# Altium PCB toaster.PcbDoc
Units mm, origin at the board's own origin, x right, y up, seen from the top; angles counter-clockwise.
Board outline 65 x 31 mm, 2 copper layers (Top Layer, Bottom Layer), stack 1.549 mm thick; 29 components, 15 nets, 73 pads, 35 vias.
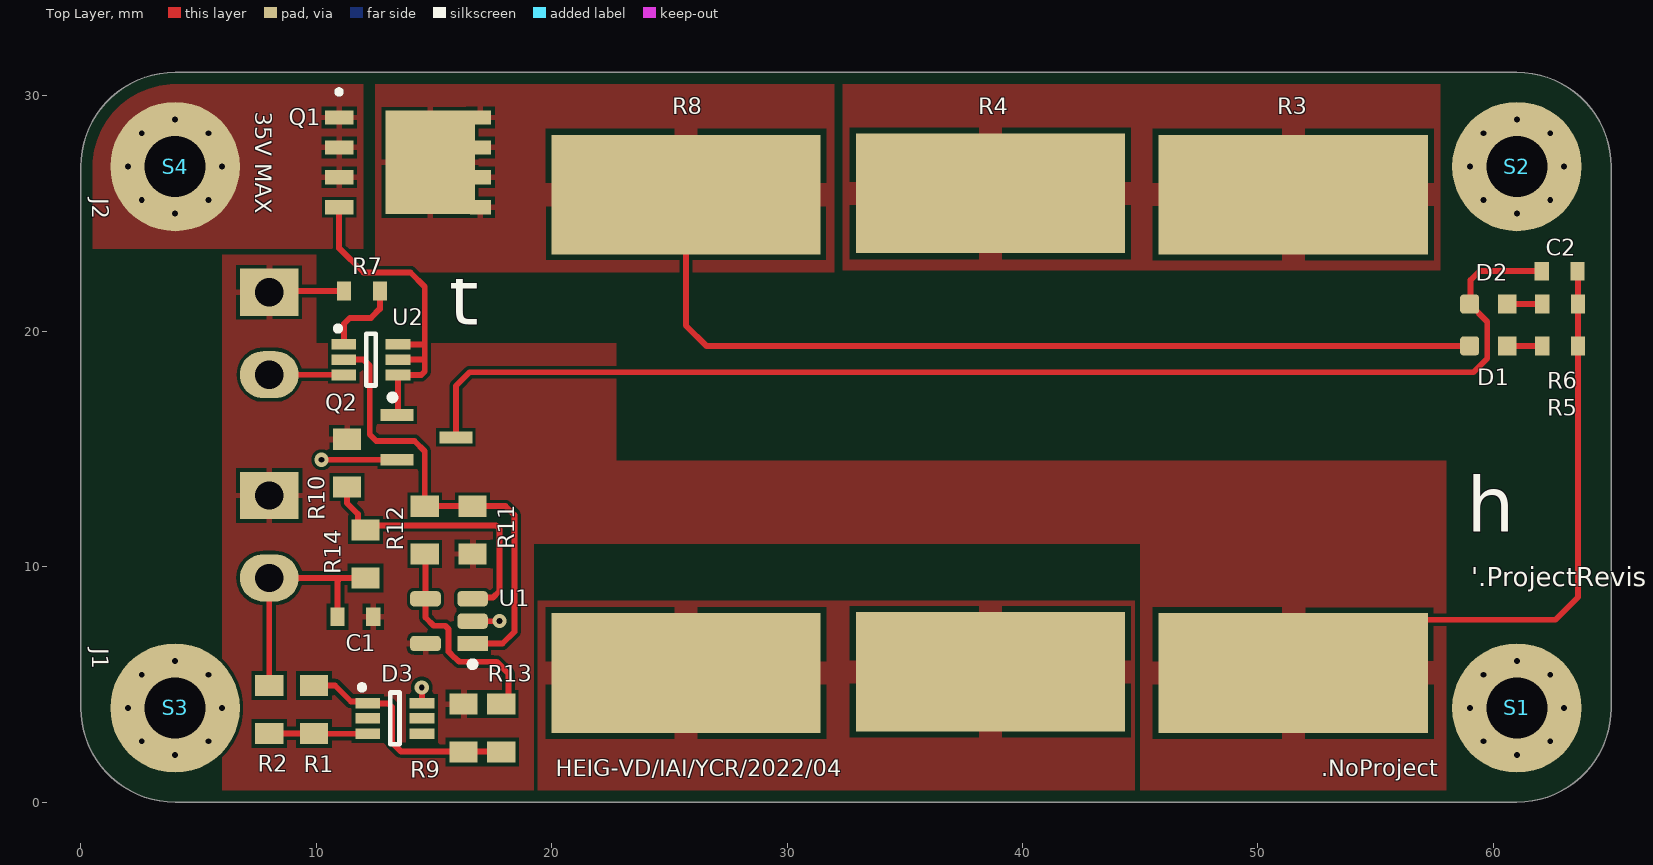
[diagram p0: Top Layer view]
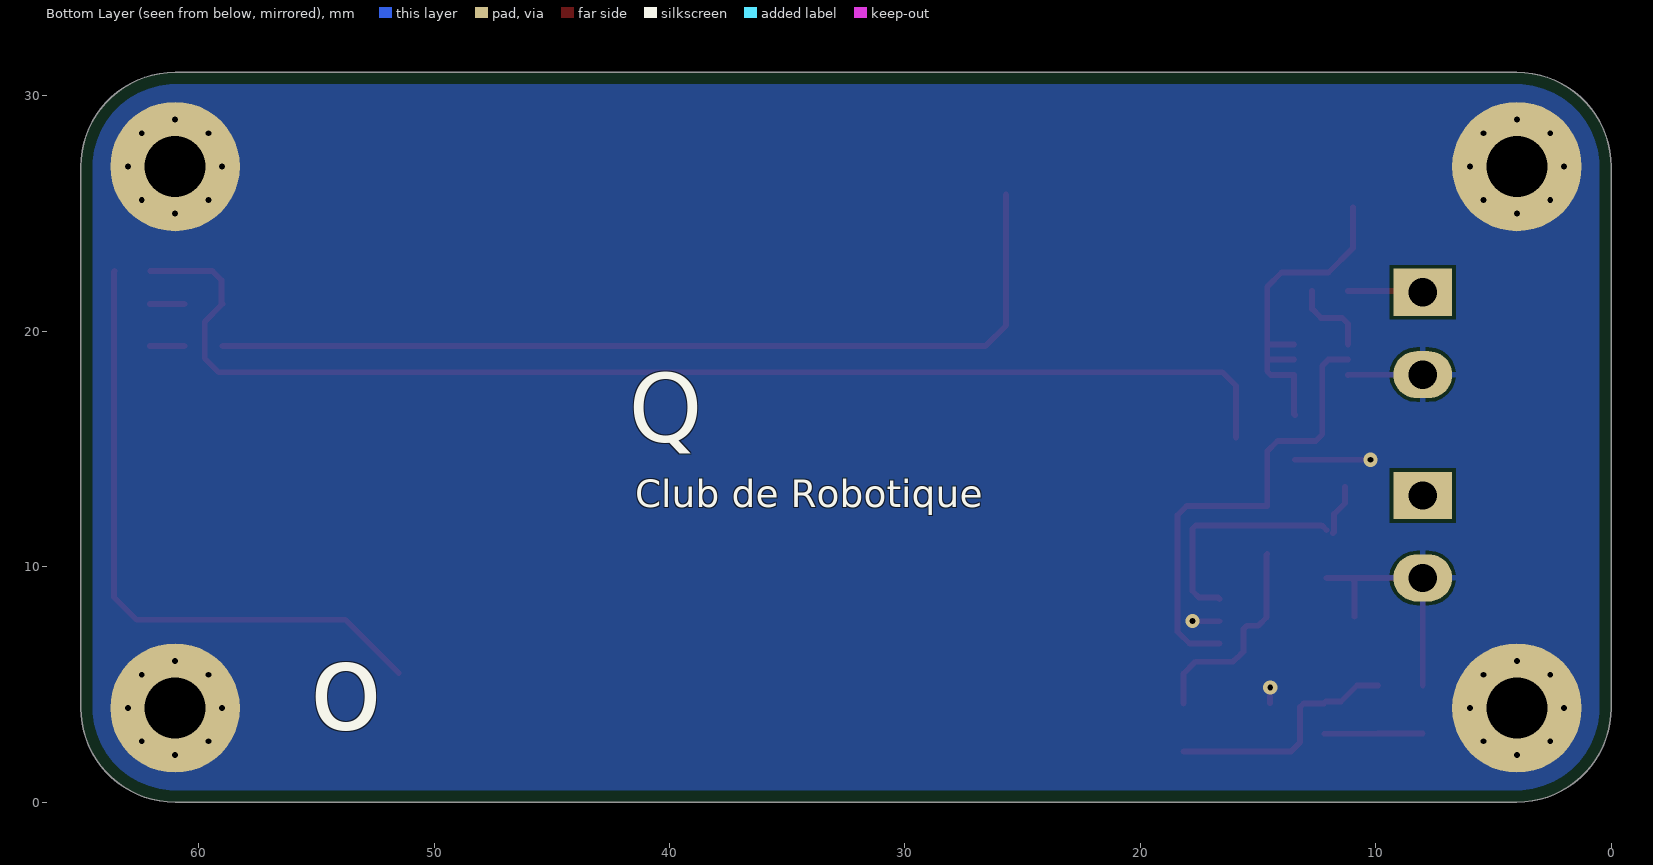
[diagram p1: Bottom Layer view, seen from below]
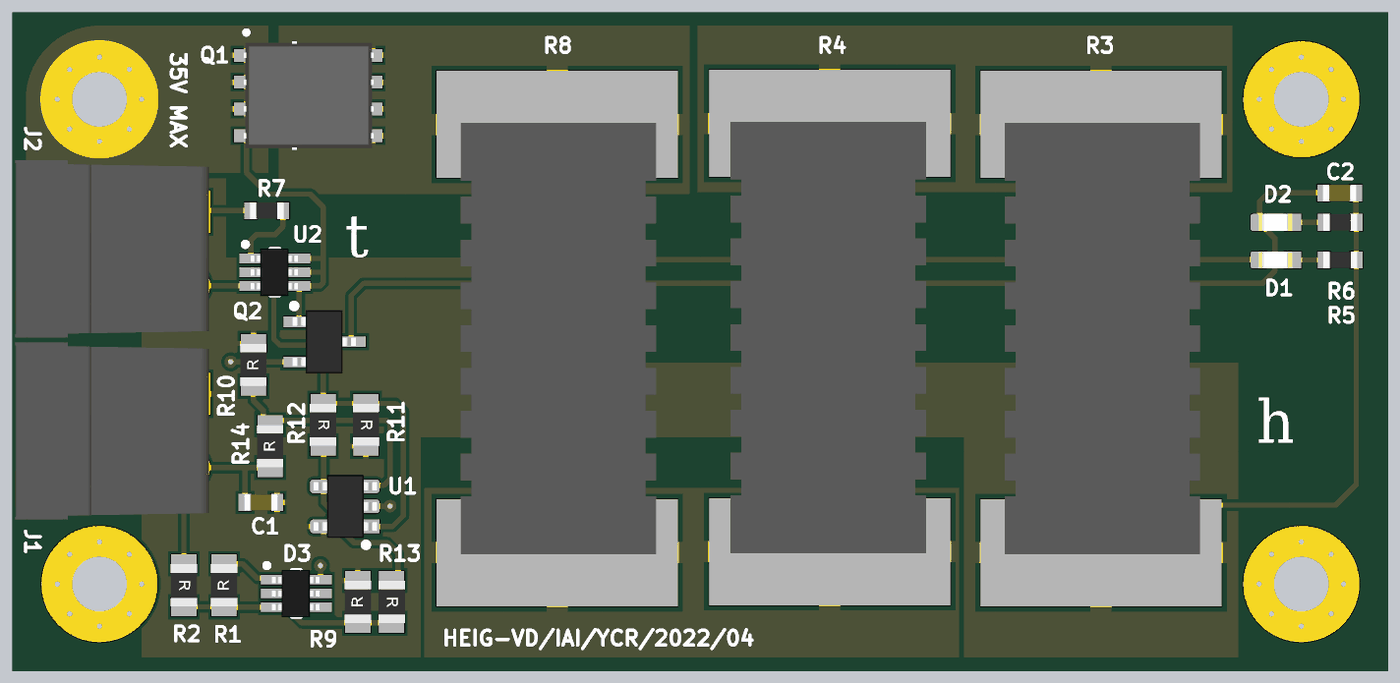
[diagram p2: 3D render of the assembled board from above, using the file's embedded part models]

## Layer stack, top to bottom
Top Solder: solder mask 0.0102, Solder Resist, Dk 3.5
Top Layer: signal copper 0.0356
Dielectric 1: dielectric 1.478, FR-4, Dk 4.8
Bottom Layer: signal copper 0.0356
Bottom Solder: solder mask 0.0102, Solder Resist, Dk 3.5

## Board outline
4,0 cw(c4,4) 0,4 0,27 cw(c4,27) 4,31 61,31 cw(c61,27) 65,27 65,4 cw(c61,4) 61,0

## Design rules (kind name [scope] priority, off if disabled: settings)
BoardOutlineClearance Connectors [(InComponent('J1') OR InComponent('J2'))] p1: gap=0 ignorepadtopadclearanceinfootprint=FALSE
BoardOutlineClearance [All] p2: gap=0.5 ignorepadtopadclearanceinfootprint=FALSE
Clearance [All] p1: gap=0.15 ignorepadtopadclearanceinfootprint=FALSE
HoleSize [All] p1: absolutevalues=TRUE maxlimit=5.08 minlimit=0.25 maxpercent=80.000 minpercent=20.000
HoleToHoleClearance [All] p1: gap=0.15 allowstackedmicrovias=TRUE
MinimumSolderMaskSliver [All] p1: minsoldermaskwidth=0.1
PolygonConnect R [HasFootprint('RW5S0FA')] p1: connectstyle=Relief reliefconductorwidth=1 reliefentries=4 polygonreliefangle="90 Angle" airgapwidth=0.25
PolygonConnect S [HasFootprint('HW/HOLE/M2.5/VIA')] p2: connectstyle=Direct reliefconductorwidth=0.254 reliefentries=4 polygonreliefangle="90 Angle" airgapwidth=0.254
PolygonConnect [All] p3: thpad.connectstyle=Relief thpad.reliefconductorwidth=0.25 thpad.reliefentries=4 thpad.polygonreliefangle="90 Angle" thpad.airgapwidth=0.15 smdpad.connectstyle=Relief smdpad.reliefconductorwidth=0.25 smdpad.reliefentries=4 smdpad.polygonreliefangle="90 Angle" smdpad.airgapwidth=0.15 via.connectstyle=Direct via.reliefconductorwidth=0.254 via.reliefentries=4 via.polygonreliefangle="90 Angle" via.airgapwidth=0.254
RoutingVias [All] p1: holewidth=0.25 width=0.6 viastyle="Through Hole" minholewidth=0.25 minwidth=0.6 maxholewidth=1 maxwidth=2
SilkToSilkClearance [All] p1: silktosilkclearance=0.1
SilkToSolderMaskClearance [IsPad] p1: minsilkscreentomaskgap=0.15 clearancetoexposedcopper=TRUE
SolderMaskExpansion [All] p1: expansion=0.05 istentingtop=FALSE
UnRoutedNet [All] p1: checkbadconnections=TRUE
Width [All] p1: maxlimit=1 minlimit=0.15 preferedwidth=0.25
24 further rules are at their usual default settings.

## Components (designator, comment, footprint, x,y, rotation, side; value= is the part's Value field where it differs from the comment)
C1 "100n" SM/C0603 11.684,7.874 r0 top
C2 "47uF" SM/C0603 62.84,22.555 r0 top
D1 "" SM/LED0603 59.792,19.38 r180 top
D2 "" SM/LED0603 59.792,21.158 r180 top
D3 "TL431BCDCKT" SC70-6 13.335,3.556 r0 top
J1 "395021002" "CONN2/PHOENIX/MC 1.5-2-G-3.5-BLACK" 8.001,13.025 r270 top
J2 "395021002" "CONN2/PHOENIX/MC 1.5-2-G-3.5-BLACK" 8.001,21.661 r270 top
Q1 "STL2N80K5" PG-TDSON-8_INF 13.97,27.178 r0 top
Q2 "DMN67D7L-7" SOT23-3 14.732,15.494 r0 top
R1 "100k" SM/R0805 9.906,3.937 r90 top
R2 "100k" SM/R0805 8.001,3.937 r270 top
R3 "10" RW5S0FA 51.5,28.346 r270 top
R4 "10" RW5S0FA 38.633,2.997 r90 top
R5 "220" SM/R0603 62.84,19.38 r0 top
R6 "220" SM/R0603 62.84,21.158 r0 top
R7 "100" SM/R0603 11.938,21.717 r0 top
R8 "10" RW5S0FA 25.705,28.346 r270 top
R9 "10k" SM/R0805 16.256,3.15 r90 top
R10 "620k" SM/R0805 11.303,14.402 r90 top
R11 "10k" SM/R0805 16.637,11.557 r270 top
R12 "560k" SM/R0805 14.605,11.557 r270 top
R13 "20k" SM/R0805 17.856,3.15 r270 top
R14 "820k" SM/R0805 12.09,10.541 r90 top
S1 "M2.5" HW/HOLE/M2.5/VIA 61,4 r0 top
S2 "M2.5" HW/HOLE/M2.5/VIA 61,27 r0 top
S3 "M2.5" HW/HOLE/M2.5/VIA 4,4 r0 top
S4 "M2.5" HW/HOLE/M2.5/VIA 4,27 r0 top
U1 "TS391" SOT23-5 15.637,7.686 r180 top
U2 "ZXGD3009DYTA" SC70-6 12.319,18.796 r0 top

## Footprints (in the part's own frame and the unit in brackets; to place one, negate y for a bottom-side part, rotate by r counter-clockwise, add the part's x,y. Pads: shape width x height; smd on the part's side, far side on the other; paste and mask are expansions set on the pad)
"CONN2/PHOENIX/MC 1.5-2-G-3.5-BLACK" [mm]
  rect 2x2.5 hole 1.2: 1(0,0)
  oval 2x2.5 hole 1.2: 2(3.5,0)
  body extent -2.44,-8 5.96,1.2, height 7.25
HW/HOLE/M2.5/VIA [mm]
  round 5.5 hole 2.6: 1(0,0)
PG-TDSON-8_INF [mm]
  rect 1.2x0.6 smd: 1(-3,1.905) 2(-3,0.635) 3(-3,-0.635) 4(-3,-1.905)
  rect 0.9x0.6 smd: 5(3,-1.905) 6(3,-0.635) 7(3,0.635) 8(3,1.905)
  rect 3.8x4.4 smd paste-3: 8(0.864,0)
  silkscreen extent -3.1,2.89 -2.9,3.09, body extent -3.12,-2.58 3.03,2.58, height 1.1
RW5S0FA [mm]
  rect 5.08x11.43 smd: 1(2.54,0) 2(22.86,0)
  body extent 2.46,-4.57 22.94,4.7, height 10.31
SC70-6 [mm] "SOT363, 6-Leads, Body 2x1.3mm, Pitch 0.65mm, Lead Span 2.1mm, IPC Low Density"
  rect 1.05x0.45 smd: 1(-1.15,0.65) 2(-1.15,0) 3(-1.15,-0.65) 4(1.15,-0.65) 5(1.15,0) 6(1.15,0.65)
  silkscreen extent -1.49,-1.1 0.2,1.41, body extent -1.15,-1.13 1.1,1.12, height 1.1
SM/C0603 [mm] "Chip Capacitor, Body 1.6x0.8mm, IPC Low Density"
  rect 0.6x0.8 smd: 1(-0.787,0) 2(0.737,0)
  body extent -0.83,-0.4 0.77,0.4, height 0.6
SM/LED0603 [mm] "Chip Capacitor, Body 1.6x0.8mm, IPC Low Density"
  rect 0.8x0.8 smd: 1(-0.8,0)
  rrect30% 0.8x0.8 smd: 2(0.8,0)
  body extent -0.78,-0.4 0.84,0.4, height 0.73
SM/R0603 [mm] "Chip Resistor, Body 1.6x0.8mm, IPC Low Density"
  rect 0.6x0.8 smd: 1(-0.762,0) 2(0.762,0)
  body extent -0.8,-0.4 0.8,0.4, height 0.4
SM/R0805 [mm] "Chip Resistor, Body 2.0x1.3mm, IPC Low Density"
  rect 0.9x1.2 smd: 1(-1.016,0) 2(1.016,0)
  body extent -1,-0.62 1,0.63, height 0.21
SOT23-3 [mm] "SOT23, 3-Leads, Body 3.0x2.6mm (max), Pitch 0.95mm, IPC Low Density"
  rect 1.4x0.5 smd: 1(-1.3,0.95) 2(-1.3,-0.95) 3(1.2,0)
  silkscreen extent -1.62,1.58 -1.37,1.82, body extent -1.57,-1.5 1.42,1.5, height 1.46
SOT23-5 [mm] "SOT23, 5-Leads, Body 3.0x2.6mm (max), Pitch 0.95mm, IPC Low Density"
  rect 1.3x0.65 smd: 1(-1,0.95)
  rrect50% 1.3x0.65 smd: 2(-1,0) 3(-1,-0.95) 4(1,-0.95) 5(1,0.95)
  silkscreen extent -1.13,1.7 -0.88,1.95, body extent -1.52,-1.5 1.48,1.5, height 1.45

## Part data
C1 C2: library part C, "Chip Capacitor", Dielectric=X7R, Supplier 2 Part Number=1292-1393-1-ND, Voltage=16V, Supplier 2=Digi-Key
D1 D2: library part LED, Supplier Part Number 1=492-1325-1-ND, Supplier 1=Digi-Key
D3: library part "D ZENER ADJ", "IC VREF SHUNT ADJ 0.5% SC70-6", Supplier Part Number 1=296-TL431BCDCKTCT-ND, Supplier 1=Digi-Key
J1 J2: library part "CONN 2 PHOENIX 3.5 mm", "TERM BLOCK HDR 2POS 90DEG 3.5MM BLACK", Supplier Part Number 1=WM7770-ND, Imax=8A, Supplier 1=Digi-Key
Q1: library part BSC0502NSIATMA1, "MOSFET N-CH 800V 2A POWERFLATN-Channel 800 V 2A (Tc) 33W (Tc) Surface Mount PowerFlat™ (5x6)", Supplier Part Number 1=497-14539-1-ND, Supplier 1=Digi-Key
Q2: library part FDN335, "MOSFET N-CH 60V 210MA SOT23-3", Supplier Part Number 1=DMN67D7L-7DICT-ND, Supplier 1=Digi-Key
R1 R2 R5 R6 R7 R9 R10 R11 R12 R13 R14: library part R, "Chip Resistor SMD"
R3 R4 R8: library part RT, "Chip Resistor SMD", Supplier Part Number 1=RW5S0FA10R0JE-ND, Supplier 1=Digi-Key
S1 S2 S3 S4: library part HOLE/M2.5
U1: Supplier Part Number 1=TS391SN2T1GOSCT-ND, Supplier 1=Digi-Key
U2: library part ZXGD3009DY, "IC GATE DRVR LOW-SIDE SOT363", Supplier Part Number 1=ZXGD3009DYTADICT-ND, Supplier 1=Digi-Key

## Via types
v1: diameter 0.6, hole 0.25, Top Layer to Bottom Layer, 32 vias
v2: diameter 0.6, hole 0.25, Top Layer to Bottom Layer, tented both sides, 3 vias

## Nets (pads, with @x,y where several pads share a name; then routed paths per layer and width w, separated by ;. In a path a pad name is that pad's centre, name@x,y a point inside that pad or via, vN(x,y) a via of type N, cw(c..) or ccw(c..) an arc to the next point about the centre after c; other vN are vias at no path point)
+VBUS: C1.2 C2.2 J1.1 J2.1 R3.2 R5.2 R6.2 R7.1 R9.2 R10.2 R11.2 U1.5 | length 30.5
  Top Layer w0.25: J2.1 8.057,21.717 R7.1 ; R3.2 53.761,7.747 62.636,7.747 63.602,8.712 R5.2 R6.2 63.589,21.171 63.589,22.543 C2.2
GND: C1.1 D3.6 J1.2 J2.2 Q1.1 Q1.2 Q1.3 Q2.2 R2.1 R14.1 S1.1 S2.1 S3.1 S4.1 U1.2 U2.3 | length 18.6
  Top Layer w0.25: R2.1 J1.2 10.795,9.525 ; J2.2 8.009,18.153 11.162,18.153 U2.3 ; v2(10.226,14.544) Q2.2 ; C1.1 10.897,9.373 10.922,9.398 10.795,9.525 ; R14.1 10.795,9.525 ; v2(14.478,4.877) 14.485,4.87 D3.6 ; U1.2 17.77,7.686 v2(17.78,7.696)
  other v1: 4,2 61,2 2.586,2.586 5.414,2.586 59.586,2.586 62.414,2.586 2,4 6,4 59,4 63,4 2.586,5.414 5.414,5.414 59.586,5.414 62.414,5.414 4,6 61,6 4,25 61,25 2.586,25.586 5.414,25.586 59.586,25.586 62.414,25.586 2,27 6,27 59,27 63,27 2.586,28.414 5.414,28.414 59.586,28.414 62.414,28.414 4,29 61,29
NetC2_1: C2.1 D2.2 Q2.3 | length 53.3
  Top Layer w0.25: Q2.3 15.932,17.685 16.51,18.263 59.157,18.263 59.741,18.847 59.741,20.409 D2.2 59.03,21.196 59.03,22.174 59.411,22.555 C2.1
NetD1_1: D1.1 R5.1 | length 1.5
  Top Layer w0.25: D1.1 R5.1
NetD1_2: D1.2 Q1.5 Q1.6 Q1.7 Q1.8 R8.1 | length 39.2
  Top Layer w0.254: R8.1 25.705,20.244 26.568,19.38 D1.2
NetD2_1: D2.1 R6.1 | length 1.5
  Top Layer w0.25: D2.1 R6.1
NetQ1_4: Q1.4 Q2.1 U2.4 U2.5 U2.6 | length 14.9
  Top Layer w0.25: Q1.4 10.97,23.53 12,22.5 14,22.5 14.605,21.895 14.605,19.446 ; Q2.1 13.469,16.481 U2.4 14.459,18.146 14.605,18.292 14.605,18.735 ; U2.5 14.544,18.796 14.605,18.735 ; U2.6 14.605,19.446 ; 14.605,18.735 14.605,19.446
NetR3_1: R3.1 R4.2
NetR4_1: R4.1 R8.2
NetR7_2: R7.2 U2.1 | length 3.4
  Top Layer w0.25: U2.1 11.176,19.453 11.176,20.32 11.43,20.574 12.319,20.574 12.7,20.955 R7.2
NetR10_1: R10.1 R14.2 U1.3 | length 11.9
  Top Layer w0.25: R10.1 11.303,12.7 11.767,12.236 11.767,11.474 R14.2@11.811,11.43 ; R14.2 12.294,11.76 17.634,11.76 17.78,11.614 17.78,8.97 17.496,8.687 16.688,8.687 U1.3
NetR11_1: R11.1 R12.1 U1.1 U2.2 | length 20
  Top Layer w0.25: U2.2 12.014,18.796 12.268,18.542 12.268,15.621 12.548,15.342 14.173,15.342 14.605,14.91 R12.1 R11.1 18.034,12.573 18.415,12.192 18.415,7.239 17.912,6.736 U1.1
NetR12_2: R12.2 R13.1 U1.4 | length 9.1
  Top Layer w0.25: R12.2 14.637,10.509 U1.4 14.637,7.842 14.986,7.493 15.475,7.493 15.621,7.347 15.621,6.388 15.873,6.136 15.893,6.136 16.066,5.963 17.659,5.963 18.161,5.461 R13.1@18.161,4.191
VKA: D3.1 R1.2 R9.1 R13.2 | length 10.3
  Top Layer w0.25: R1.2 10.795,4.953 11.473,4.275 12.116,4.275 12.2,4.191 13.062,4.191 13.208,4.045 13.208,2.54 13.589,2.159 16.51,2.159 R13.2@18.161,2.159
VREF: D3.3 R1.1 R2.2 | length 4.2
  Top Layer w0.25: R2.2 R1.1 9.921,2.906 D3.3
pads on no net: D3.2 D3.4 D3.5

## Polygon pours and split planes (outlines as drawn)
GND on Bottom Layer "GND_L02_P000" (solid, pour order 0): 0,31 65,31 65,0 0,0
+VBUS on Top Layer "+VBUS_L01_P005" (solid, pour order 5): 6,23.25 10,23.25 10,19.5 22.75,19.5 22.75,14.5 58,14.5 58,0.25 45,0.25 45,10.973 19.228,10.973 19.228,0.25 6,0.25
NetR4_1 on Top Layer "NETR4_1_L01_P004" (solid, pour order 4): 19.409,8.558 44.772,8.558 44.772,0.058 19.409,0.058
NetR3_1 on Top Layer "NETR3_1_L01_P003" (solid, pour order 3): 32.371,31.086 57.734,31.086 57.734,22.586 32.371,22.586
GND on Top Layer "GND_L01_P002" (solid, pour order 2): 12,30.5 12,23.5 0,23.5 0,30.5
NetD1_2 on Top Layer "NETD1_2_L01_P001" (solid, pour order 1): 12.5,31 32,31 32,22.5 12.5,22.5

## Silkscreen, mask and mechanical layers (free items; w line width, h text height)
Top Overlay:
  text "35V MAX" at 7.399,29.329 h0.7 r270
  text "t" at 15.645,19.529 h4
  text "h" at 58.877,10.715 h4
  text "'.ProjectRevision'" at 59.052,9.166 h0.8
  text "HEIG-VD/IAI/YCR/2022/04" at 20.175,1.1 h0.7
  text ".NoProject" at 52.687,1.1 h0.7
Bottom Overlay:
  text "Q" at 41.722,14.36 h5
  text "Club de Robotique" at 41.461,12.15 h2
  text "o" at 55.296,1.848 h6.4
Board:
  the board outline again, w0.254

## Dimensions
59.766,30.988 to 59.715,0 on Top Dimensions
0,26.645 to 64.999,25.654 on Top Dimensions